# Altium PCB jlink_ob072.PcbDoc
Units mm, origin at the board's own origin, x right, y up, seen from the top; angles counter-clockwise.
Board outline 44.88 x 18.57 mm, 2 copper layers (Top Layer, Bottom Layer); 24 components, 25 nets, 109 pads, 20 vias.
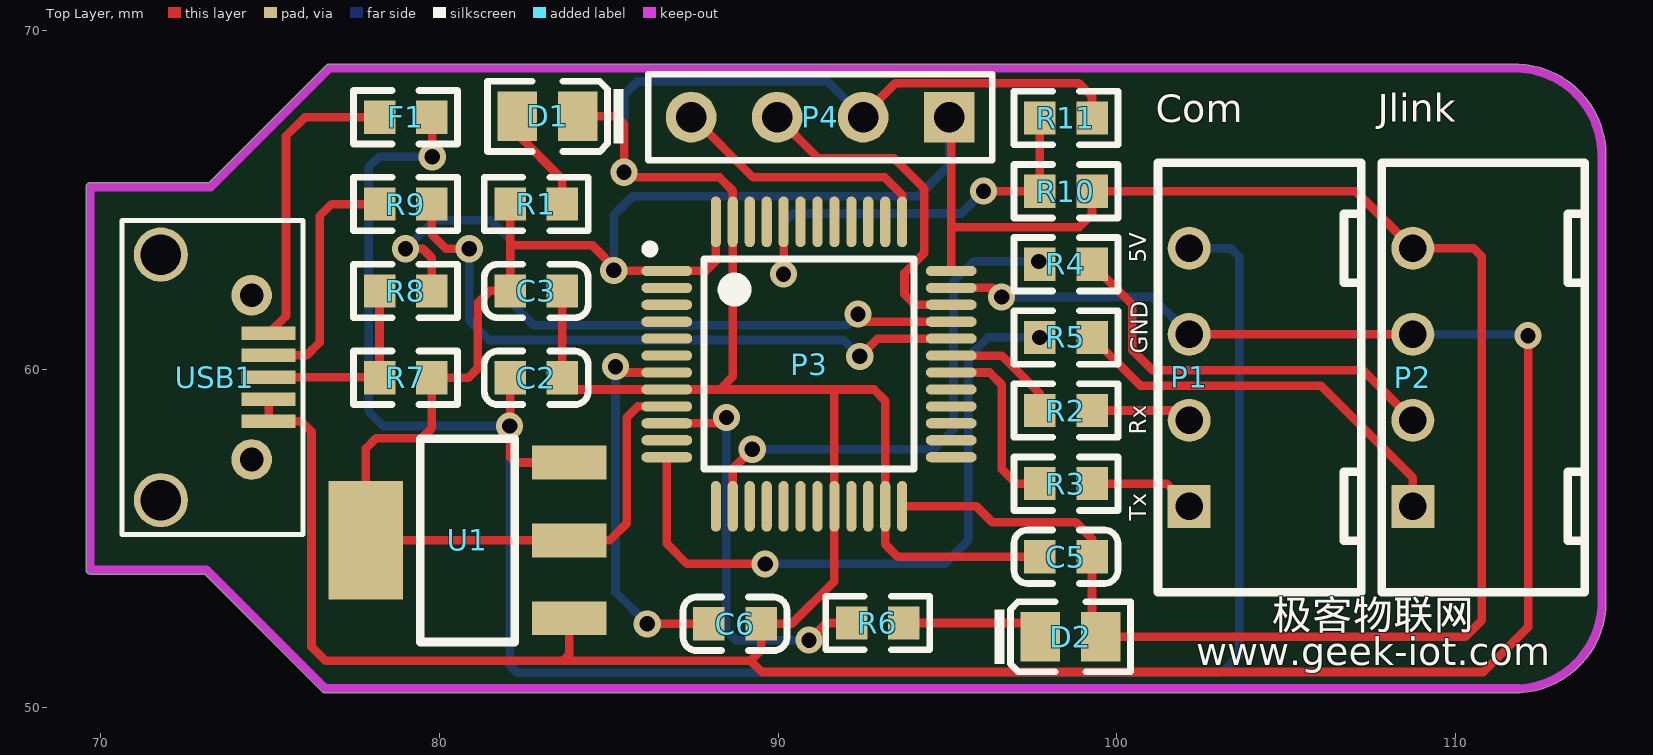
[diagram p0: Top Layer view]
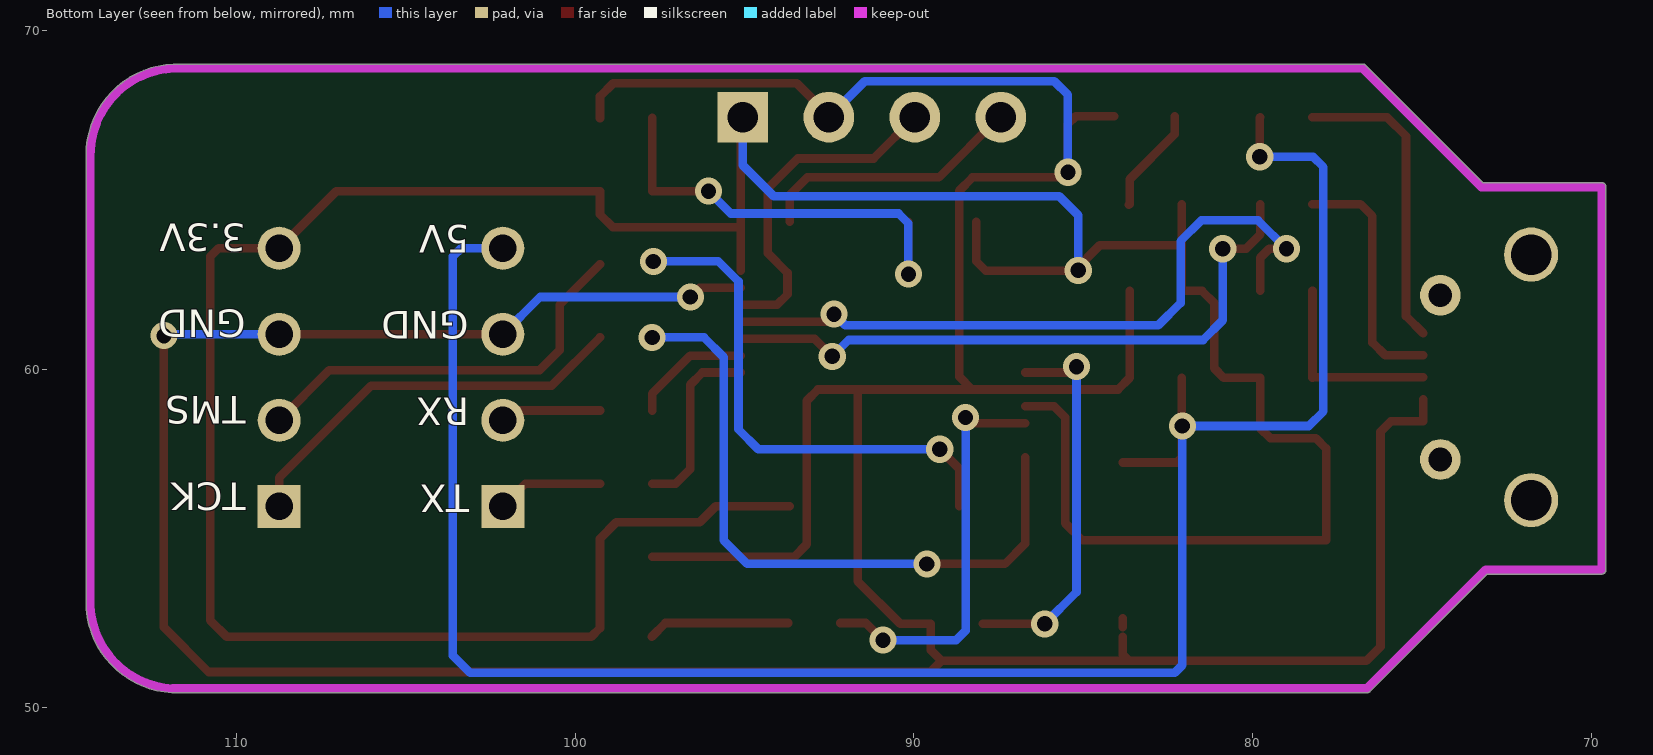
[diagram p1: Bottom Layer view, seen from below]
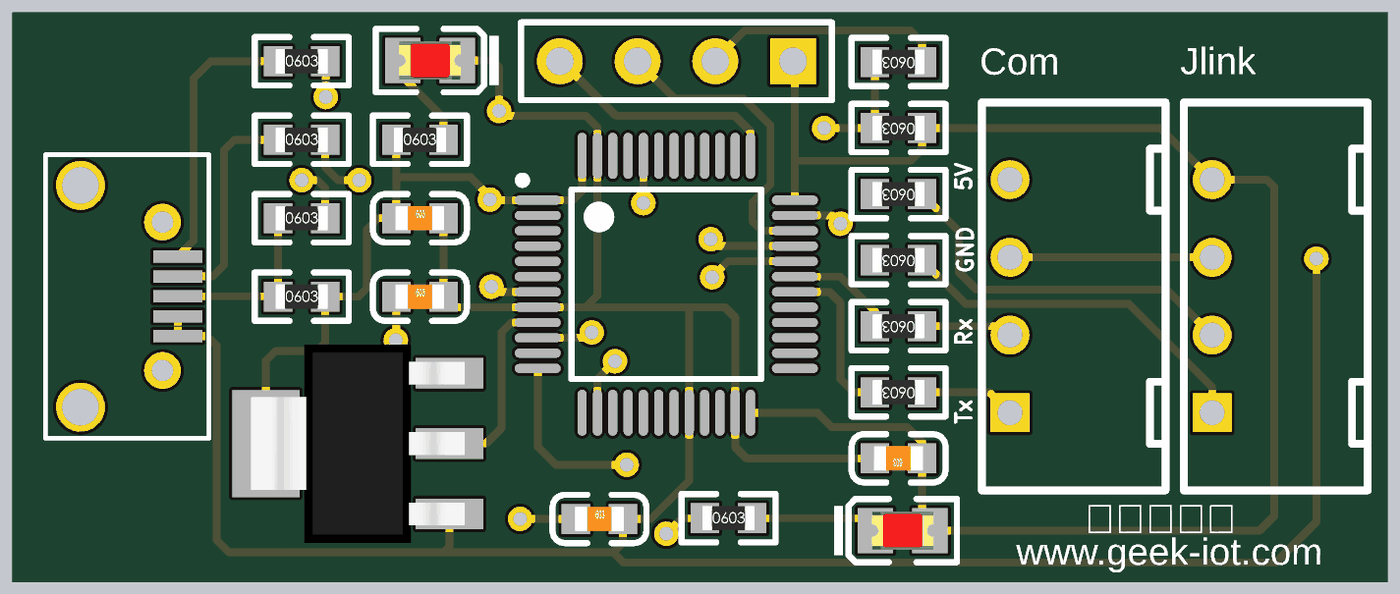
[diagram p2: 3D render of the assembled board from above, using the file's embedded part models]

## Layer stack, top to bottom
Top Solder: solder mask 0.0102, Solder Resist, Dk 3.5
Top Layer: signal copper 0.0356
Dielectric1: dielectric 0.32, FR-4, Dk 4.8
Bottom Layer: signal copper 0.0356
Bottom Solder: solder mask 0.0102, Solder Resist, Dk 3.5

## Board outline
69.685,53.944 73.061,53.944 76.529,50.477 76.528,50.477 ccw(c76.619,50.567) 76.619,50.439 111.874,50.439 ccw(c111.874,50.567) 111.903,50.443 ccw(c111.75,53.129) 114.441,53.129 ccw(c111.75,53.129) 114.439,53.216 ccw(c114.312,53.227) 114.44,53.227 114.44,66.213 ccw(c114.312,66.213) 114.438,66.236 ccw(c111.747,66.315) 114.439,66.315 ccw(c111.747,66.315) 111.85,69.005 ccw(c111.823,68.88) 111.823,69.007 76.746,69.007 ccw(c76.746,68.88) 76.655,68.97 76.656,68.97 73.188,65.502 69.685,65.502 ccw(c69.685,65.375) 69.557,65.375 69.557,54.072 ccw(c69.685,54.072)

## Design rules (kind name [scope] priority, off if disabled: settings)
Clearance [All] p1: gap=0.127 ignorepadtopadclearanceinfootprint=FALSE
PlaneClearance [All] p1: clearance=0.254
PolygonConnect [IsVia] p1: connectstyle=Direct reliefconductorwidth=0.254 reliefentries=4 polygonreliefangle="90 Angle" airgapwidth=0.254
PolygonConnect PolygonConnect_1 [All] p2: connectstyle=Relief reliefconductorwidth=0.254 reliefentries=4 polygonreliefangle="90 Angle" airgapwidth=0.254
RoutingVias [All] p1: holewidth=0.711 width=1.27 viastyle="Through Hole" minholewidth=0.45 minwidth=0.8 maxholewidth=0.711 maxwidth=1.27
SolderMaskExpansion [All] p1: expansion=0.102
Width [All] p1: maxlimit=0.254 minlimit=0.254 preferedwidth=0.254
29 further rules are at their usual default settings.

## Components (designator, comment, footprint, x,y, rotation, side; value= is the part's Value field where it differs from the comment)
C2 "100nF (104) 10% 50V" 0603_C 82.853,59.741 r0 top
C3 "1uF (105) 10% 50V" 0603_C 82.853,62.306 r0 top
C5 "100nF (104) 10% 50V" 0603_C 98.493,54.458 r180 top
C6 "100nF (104) 10% 50V" 0603_C 88.722,52.476 r0 top
D1 "红灯 0805" 0805_LED_S1 83.185,67.462 r180 top
D2 "蓝灯 0805" 0805_LED_S1 98.628,52.095 r0 top
F1 "6V1.1A" 0603_R 78.994,67.437 r0 top
P1 "Header 4" IDE4_D 104.673,55.947 r90 top
P2 "Header 4" IDE4_D 111.277,55.947 r90 top
P3 "STM32F072C8T6" LQFP48_7X7X05P 90.907,60.147 r0 top
P4 "SWD_IN" HDR1X4 95.047,67.437 r180 top
R1 "4.7KΩ (4701) ±1%" 0603_R 82.853,64.872 r0 top
R2 "100Ω (1000) ±1%" 0603_R 98.493,58.776 r180 top
R3 "100Ω (1000) ±1%" 0603_R 98.493,56.617 r180 top
R4 "100Ω (1000) ±1%" 0603_R 98.493,63.094 r180 top
R5 "100Ω (1000) ±1%" 0603_R 98.493,60.935 r180 top
R6 "1KΩ (1001) ±1%" 0603_R 92.939,52.502 r0 top
R7 "1KΩ (1001) ±1%" 0603_R 78.994,59.741 r0 top
R8 "100Ω (1000) ±1%" 0603_R 78.994,62.306 r0 top
R9 "100Ω (1000) ±1%" 0603_R 78.994,64.872 r0 top
R10 "10KΩ (1002) ±1%" 0603_R 98.493,65.253 r180 top
R11 "10KΩ (1002) ±1%" 0603_R 98.493,67.412 r180 top
U1 "AMS1117-3.3" SOT-223 80.823,54.94 r0 top
USB1 "USB-B(Mini)" MINIUSB 71.767,63.368 r0 top

## Footprints (in the part's own frame and the unit in brackets; to place one, negate y for a bottom-side part, rotate by r counter-clockwise, add the part's x,y. Pads: shape width x height; smd on the part's side, far side on the other; paste and mask are expansions set on the pad)
0603_C [mm]
  rect 0.93x0.98 smd: 1(-0.77,0) 2(0.77,0)
  silkscreen extent -1.53,-0.79 1.54,0.79, body extent -0.8,-0.4 0.8,0.4, height 0.3
0603_R [mm]
  rect 0.93x0.98 smd: 1(-0.77,0) 2(0.77,0)
  silkscreen extent -1.53,-0.79 1.54,0.79, body extent -0.85,-0.4 0.85,0.4, height 0.56
0805_LED_S1 [mm]
  rect 1.16x1.47 smd: A(0.89,0) K(-0.89,0)
  silkscreen extent -2.25,-1.04 1.77,1.03, body extent -1.01,-0.62 1.01,0.62, height 1.1
HDR1X4 [mm] "Connector; Header; 4 Position"
  rect 1.5x1.5 hole 0.9: 1(0,0)
  round 1.5 hole 0.9: 2(2.54,0) 3(5.08,0) 4(7.62,0)
  silkscreen extent -1.27,-1.27 8.89,1.27
IDE4_D [mil]
  rect 50x50 hole 32: 1(0,100)
  round 50 hole 32: 2(100,100) 3(200,100) 4(300,100)
  silkscreen extent -100,-100 399,136
LQFP48_7X7X05P [mm]
  oval 1.5x0.3 smd: 1(-4.2,2.75) 2(-4.2,2.25) 3(-4.2,1.75) 4(-4.2,1.25) 5(-4.2,0.75) 6(-4.2,0.25) 7(-4.2,-0.25) 8(-4.2,-0.75) 9(-4.2,-1.25) 10(-4.2,-1.75) 11(-4.2,-2.25) 12(-4.2,-2.75) 25(4.2,-2.75) 26(4.2,-2.25) 27(4.2,-1.75) 28(4.2,-1.25) 29(4.2,-0.75) 30(4.2,-0.25) 31(4.2,0.25) 32(4.2,0.75) 33(4.2,1.25) 34(4.2,1.75) 35(4.2,2.25) 36(4.2,2.75)
  oval 0.3x1.5 smd: 13(-2.75,-4.2) 14(-2.25,-4.2) 15(-1.75,-4.2) 16(-1.25,-4.2) 17(-0.75,-4.2) 18(-0.25,-4.2) 19(0.25,-4.2) 20(0.75,-4.2) 21(1.25,-4.2) 22(1.75,-4.2) 23(2.25,-4.2) 24(2.75,-4.2) 37(2.75,4.2) 38(2.25,4.2) 39(1.75,4.2) 40(1.25,4.2) 41(0.75,4.2) 42(0.25,4.2) 43(-0.25,4.2) 44(-0.75,4.2) 45(-1.25,4.2) 46(-1.75,4.2) 47(-2.25,4.2) 48(-2.75,4.2)
  silkscreen extent -4.82,-3.1 3.1,3.52
MINIUSB [mm]
  round 1.6 hole 1.2: 0(0,-7.239) 0(0,0.011)
  round 1.2 hole 0.7: 0(2.68,-6.039) 0(2.68,-1.189)
  rect 1.6x0.4 smd: 1(3.183,-2.314) 2(3.183,-2.964) 3(3.183,-3.614) 4(3.183,-4.264) 5(3.183,-4.914)
  silkscreen extent -1.14,-8.25 4.2,1.02
SOT-223 [mm]
  rect 2.2x1 smd: 1(3,-2.3) 2(3,0) 3(3,2.3)
  rect 2.2x3.5 smd: 2(-3,0)
  silkscreen extent -1.4,-3 1.4,3, body extent -3.49,-3.24 3.49,3.24, height 1.64

## Part data
C2 C5 C6: library part "0603 100nF (104) 10% 50V", "贴片电容", Package=0603, SuppliersPartNumber=C14663, ComponentLink1Description=供应商链接, ComponentLink1URL=http://www.szlcsc.com/product/details_15331.html, Supplier=LC
C3: library part "0603 1uF (105) 10% 50V", "贴片电容", Package=0603, SuppliersPartNumber=C15849, ComponentLink1Description=供应商链接, ComponentLink1URL=http://www.szlcsc.com/product/details_16531.html, Supplier=LC
D1: library part "0805 红灯", "发光二极管", Package=0805, SuppliersPartNumber=C2295, ComponentLink1Description=供应商链接, ComponentLink1URL=http://www.szlcsc.com/product/details_2668.html, Supplier=LC
D2: library part "0805 蓝灯", "发光二极管", Package=0805, SuppliersPartNumber=C2293, ComponentLink1Description=供应商链接, ComponentLink1URL=http://www.szlcsc.com/product/details_2666.html, Supplier=LC
F1: library part "0603 0Ω (0R0) 1%", "贴片电阻", Package=0603, SuppliersPartNumber=C21189, ComponentLink1Description=供应商链接, ComponentLink1URL=http://www.szlcsc.com/product/details_21903.html, Supplier=LC
P1 P2: "Header, 4-Pin", LatestRevisionDate=17-Jul-2002, LatestRevisionNote="Re-released for DXP Platform.", Publisher="Altium Limited"
P3: library part stm32f103v8t6
P4: library part "Header 4", "Header, 4-Pin", LatestRevisionDate=17-Jul-2002, LatestRevisionNote="Re-released for DXP Platform.", Publisher="Altium Limited"
R1: library part "0603 4.7KΩ (4701) 1%", "贴片电阻", Package=0603, SuppliersPartNumber=C23162, ComponentLink1Description=供应商链接, ComponentLink1URL=http://www.szlcsc.com/product/details_23889.html, Supplier=LC
R2 R3 R4 R5 R8 R9: library part "0603 100Ω (1000) 1%", "贴片电阻", Package=0603, SuppliersPartNumber=C22775, ComponentLink1Description=供应商链接, ComponentLink1URL=http://www.szlcsc.com/product/details_23502.html, Supplier=LC
R6 R7: library part "0603 1KΩ (1001) 1%", "贴片电阻", Package=0603, SuppliersPartNumber=C21190, ComponentLink1Description=供应商链接, ComponentLink1URL=http://www.szlcsc.com/product/details_21904.html, Supplier=LC
R10 R11: library part "0603 10KΩ (1002) 1%", "贴片电阻", Package=0603, SuppliersPartNumber=C25804, ComponentLink1Description=供应商链接, ComponentLink1URL=http://www.szlcsc.com/product/details_26547.html, Supplier=LC
U1: library part "SOT-223 AMS1117-3.3", "低压差线性稳压(LDO)", Package=SOT-223, SuppliersPartNumber=C6186, ComponentLink1Description=供应商链接, ComponentLink1URL=http://www.szlcsc.com/product/details_6652.html, Supplier=LC
USB1: library part miniUSB

## Via types
v1: diameter 0.8, hole 0.45, Top Layer to Bottom Layer, 20 vias

## Nets (pads, with @x,y where several pads share a name; then routed paths per layer and width w, separated by ;. In a path a pad name is that pad's centre, name@x,y a point inside that pad or via, vN(x,y) a via of type N, cw(c..) or ccw(c..) an arc to the next point about the centre after c; other vN are vias at no path point)
BOOT0: P3.44 R10.2 R11.2 | length 13.2
  Top Layer w0.254: v1(90.157,62.802) P3.44 ; v1(96.063,65.253) R10.2 R11.2
  Bottom Layer w0.254: v1(90.157,62.802) 90.157,64.299 90.449,64.592 95.402,64.592 v1(96.063,65.253)
COM_RX: P3.31 R2.2 | length 3.6
  Top Layer w0.254: P3.31 96.6,60.397 97.723,59.274 R2.2
COM_TX: P3.30 R3.2 | length 5.4
  Top Layer w0.254: P3.30 96.237,59.897 96.596,59.538 96.596,57.048 97.028,56.617 R3.2
D+: P3.33 R8.2 | length 20.9
  Top Layer w0.254: v1(78.994,63.551) 79.502,63.551 79.764,63.289 R8.2 ; v1(92.354,61.62) 92.578,61.397 P3.33
  Bottom Layer w0.254: v1(78.994,63.551) 79.832,64.389 81.509,64.389 82.118,63.779 82.118,61.951 82.779,61.29 92.024,61.29 v1(92.354,61.62)
D-: P3.32 R9.2 | length 19.1
  Top Layer w0.254: R9.2 79.764,63.975 80.188,63.551 v1(80.874,63.551) ; v1(92.405,60.376) 92.927,60.897 P3.32
  Bottom Layer w0.254: v1(80.874,63.551) 80.874,61.443 81.458,60.858 91.923,60.858 v1@92.354,60.427
GND: C2.2 C3.2 C5.2 C6.2 D1.K P1.3 P2.3 P3.8 P3.20 P3.23 P3.35 P3.47 P4.2 R11.1 U1.1 USB1.4 USB1.5 | length 133.7
  Top Layer w0.254: USB1.4 USB1.5 75.912,58.454 76.217,58.149 76.217,51.799 76.632,51.384 83.642,51.384 ; C3.2 C2.2 83.967,59.397 P3.8 88.277,59.397 ; 83.823,52.095 83.823,51.565 83.642,51.384 ; U1.1@83.823,52.375 U1.1 ; D1.K 85.217,67.462 85.446,67.234 v1(85.446,65.811) 85.598,65.659 88.265,65.659 88.657,65.267 P3.47 88.657,59.777 88.277,59.397 ; P4.2 92.507,67.494 93.454,68.441 98.869,68.441 99.263,68.047 R11.1 ; P3.35 96.327,62.397 v1(96.596,62.128) ; C5.2 93.523,54.458 93.157,54.824 P3.23 93.157,59.066 92.825,59.397 91.669,59.397 ; P1.3 P2.3 ; v1(112.141,60.985) 112.141,52.375 110.82,51.054 89.51,51.054 89.179,51.384 ; 83.642,51.384 89.179,51.384 ; 88.277,59.397 91.669,59.397 ; 89.179,51.384 89.492,51.697 C6.2 90.399,52.476 91.657,53.734 P3.20 91.657,59.385 91.669,59.397
  Bottom Layer w0.254: v1(85.446,65.811) 85.446,68.097 85.847,68.499 91.445,68.499 P4.2 ; v1(96.596,62.128) 101.032,62.128 P1.3 ; P2.3 112.1,61.027 v1(112.141,60.985)
JTCK: P3.37 P4.4 | length 8
  Top Layer w0.254: P4.4 87.478,67.437 89.256,65.659 93.142,65.659 93.657,65.144 P3.37
JTMS: P3.34 P4.3 | length 10.7
  Top Layer w0.254: P4.3@89.967,66.827 P4.3 91.186,66.218 93.421,66.218 94.31,65.329 94.31,63.424 93.726,62.84 93.726,62.205 94.033,61.897 P3.34
LED: P3.10 R6.1 | length 12.2
  Top Layer w0.254: P3.10 88.293,58.397 v1(88.468,58.572) ; v1(90.907,51.994) 91.415,52.502 R6.1
  Bottom Layer w0.254: v1(88.468,58.572) 88.468,52.273 88.748,51.994 v1(90.907,51.994)
NetC6_1: C6.1 P3.7 | length 11.4
  Top Layer w0.254: v1(85.192,60.071) 85.365,59.897 P3.7 ; v1(86.131,52.476) C6.1
  Bottom Layer w0.254: v1(85.192,60.071) 85.192,53.416 v1(86.131,52.476)
NetD1_A: D1.A R1.2 | length 3.2
  Top Layer w0.254: D1.A 82.295,66.93 83.623,65.602 R1.2 R1.2@83.649,64.846
NetD2_K: D2.K R6.2 | length 4.2
  Top Layer w0.254: R6.2 97.332,52.502 D2.K
NetF1_1: F1.1 USB1.1 | length 9
  Top Layer w0.254: USB1.1 75.463,61.567 75.463,66.878 76.022,67.437 F1.1
NetP1_1: P1.1 R3.1 | length 3.1
  Top Layer w0.254: R3.1 101.464,56.617 P1.1
NetP1_2: P1.2 R2.1 | length 3
  Top Layer w0.254: R2.1 101.845,58.776 P1.2
NetP2_1: P2.1 R5.1 | length 12
  Top Layer w0.254: R5.1 100.686,59.512 106.02,59.512 108.737,56.794 P2.1
NetP2_2: P2.2 R4.1 | length 12.2
  Top Layer w0.254: R4.1 100.457,61.9 100.457,60.554 101.041,59.969 107.255,59.969 P2.2
NetR7_1: R7.1 R8.1 USB1.3 | length 5.8
  Top Layer w0.254: USB1.3 78.211,59.754 R7.1 R8.1
NetR9_1: R9.1 USB1.2 | length 7.3
  Top Layer w0.254: USB1.2 76.076,60.404 76.454,60.782 76.454,64.516 76.81,64.872 R9.1
"TARGET RESET": P3.11
"TARGET SWCLK": P3.12 R5.2 | length 19.7
  Top Layer w0.254: P3.12 86.707,54.848 87.307,54.247 v1@89.586,54.247
  Bottom Layer w0.254: v1(89.611,54.247) 94.912,54.247 95.606,54.94 95.606,60.35 96.19,60.935 v1(97.723,60.935)
"TARGET SWDIO": P3.14 R4.2 | length 15.2
  Top Layer w0.254: P3.14 88.657,57.059 v1(89.23,57.633)
  Bottom Layer w0.254: v1(89.23,57.633) 94.59,57.633 95.174,58.217 95.174,62.586 95.767,63.179 v1(97.688,63.179)
"TARGET SWO": P3.13
V3.3: C3.1 C5.1 D2.A P2.4 P3.1 P3.9 P3.24 P3.36 P3.48 P4.1 R1.1 R7.2 R10.1 U1.2 | length 100.1
  Top Layer w0.254: R1.1 82.083,63.652 ; P3.9 85.847,58.897 85.522,58.572 85.522,55.448 85.014,54.94 83.823,54.94 77.823,54.94 77.823,57.655 78.128,57.96 79.474,57.96 79.764,58.25 R7.2 80.848,59.741 81.128,60.02 81.128,61.951 81.483,62.306 C3.1 82.083,63.652 ; P3.48 88.157,63.188 87.865,62.897 P3.1 85.261,62.897 84.506,63.652 82.083,63.652 ; P3.24 95.843,55.947 96.317,55.474 98.781,55.474 99.263,54.991 C5.1 99.263,52.35 D2.A 110.287,52.095 110.769,52.578 110.769,63.322 110.525,63.567 P2.4 107.052,65.253 R10.1 99.263,64.567 98.882,64.186 95.107,64.186 ; P4.1 95.107,67.377 95.107,64.186 ; P3.36 95.107,64.186
  Bottom Layer w0.254: v1(85.141,62.916) 85.141,64.541 85.7,65.1 94.132,65.1 95.047,66.015 P4.1
V5: C2.1 F1.2 P1.4 U1.3 | length 61.2
  Top Layer w0.254: F1.2 79.781,67.42 v1(79.781,66.269) ; C2.1 82.083,57.388 82.231,57.24 U1.3
  Bottom Layer w0.254: v1(79.781,66.269) 78.207,66.269 77.902,65.964 77.902,58.75 78.334,58.318 v1(82.067,58.318) 82.067,51.252 82.291,51.029 103.099,51.029 103.607,51.537 103.607,63.322 103.362,63.567 P1.4
pads on no net: P3.2 P3.3 P3.4 P3.5 P3.6 P3.15 P3.16 P3.17 P3.18 P3.19 P3.21 P3.22 P3.25 P3.26 P3.27 P3.28 P3.29 P3.38 P3.39 P3.40 P3.41 P3.42 P3.43 P3.45 P3.46 USB1.0

## Keep-outs
Keep-Out Layer:
  lines w0.25: 111.823,68.88 cw(c111.747,66.315) 114.312,66.238 ; 111.874,50.567 ccw(c111.75,53.129) 114.312,53.252
  lines w0.254: 111.823,68.88 76.746,68.88 76.187,68.321 73.241,65.375 69.685,65.375 69.685,54.072 73.114,54.072 76.619,50.567 111.874,50.567 ; 114.312,53.227 114.312,66.213

## Silkscreen, mask and mechanical layers (free items; w line width, h text height)
Top Overlay:
  text "Jlink" at 107.696,67.021 h1.4
  text "Com" at 101.143,67.005 h1.4
  text "5V" at 100.863,63.144 h0.5 r90
  text "GND" at 100.914,60.452 h0.5 r90
  text "Rx" at 100.863,58.064 h0.5 r90
  text "Tx" at 100.863,55.524 h0.5 r90
  text "极客物联网" at 104.572,52.019 h1.5
  text "www.geek-iot.com" at 102.337,50.978 h1.4
Bottom Overlay:
  text "3.3V" at 109.72,64.566 h1.4 r180
  text "5V" at 103.124,64.525 h1.4 r180
  text "GND" at 109.72,62.024 h1.4 r180
  text "GND" at 103.132,61.983 h1.4 r180
  text "TMS" at 109.72,59.483 h1.4 r180
  text "RX" at 103.124,59.426 h1.4 r180
  text "TCK" at 109.72,56.918 h1.4 r180
  text "TX" at 103.124,56.862 h1.4 r180